# EAGLE board Protoboard (EAGLE 6.5.0)
DESIGNER: theairboard.cc; REV: 1.0
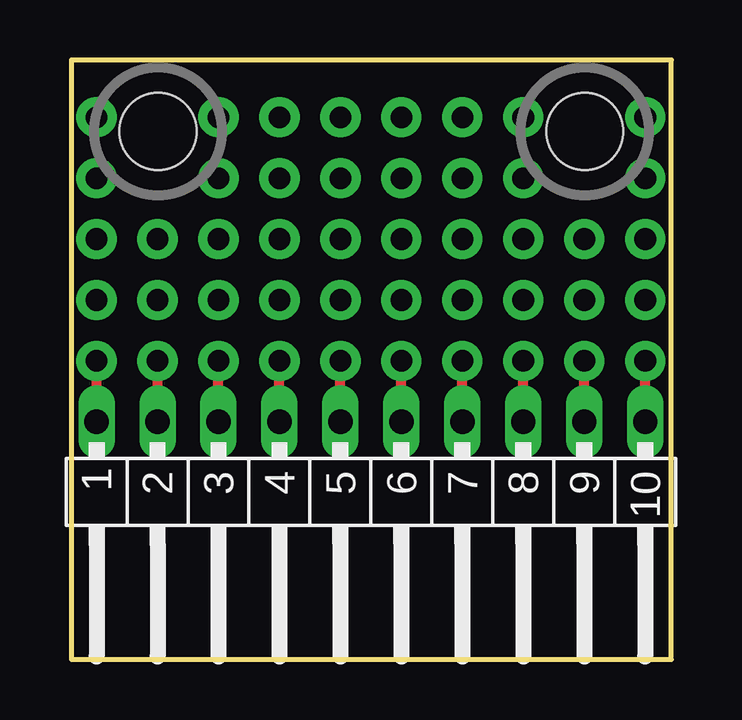
[diagram p0: board, top side]
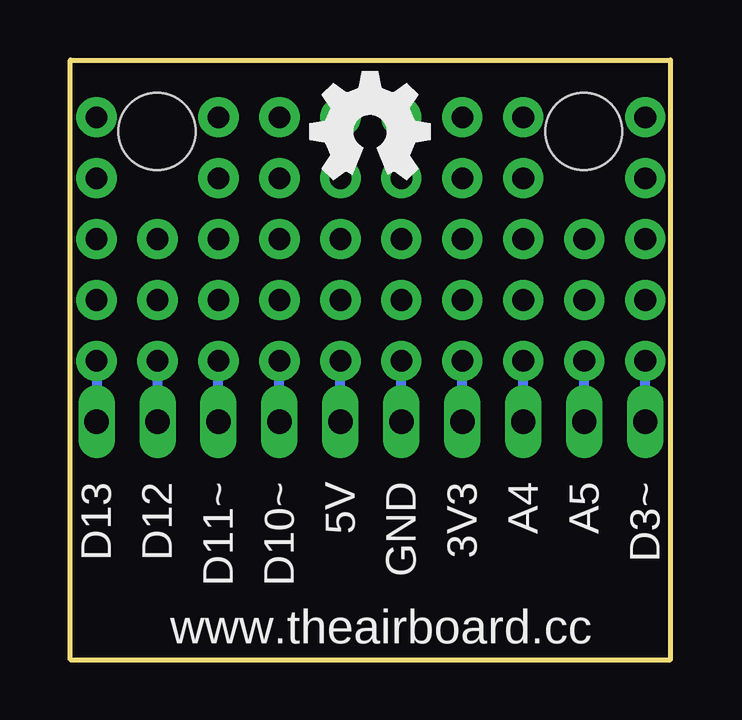
[diagram p1: board, bottom side, seen from below]

Size 25 x 25 mm. Coordinates in mm from the lower left corner, seen from the top.
Copper layers (1*16): Top 0.035mm / dielectric 1.5mm / Bottom 0.035mm
Design rules "default": minimum track width 10mil, minimum drill 24mil, track to track 8mil, track to pad 8mil, pad to pad 8mil, via to via 8mil, smd to smd 8mil, copper to edge 40mil, drill to drill 8mil, minimum pad ring 10mil, minimum via ring 8mil, stop-mask expansion 4mil, vias tented up to drill 0mil, thermal gap 10mil

## Footprints (pad centres in the part's own frame; a part is rotated, then mirrored left to right if it is on the bottom)
LAYOUT = hole 3.2: 21.61,22.275; 3.83,22.275
SIL-1X10 = drill 1.016 long: 1 11.43,0; 2 8.89,0; 3 6.35,0; 4 3.81,0; 5 1.27,0; 6 -1.27,0; 7 -3.81,0; 8 -6.35,0; 9 -8.89,0; 10 -11.43,0

## Placement (x,y rotation side)
FRAME1  SCH_FRAME  [LAYOUT]  -0.22,-0.25 0 top
JP1  SIL  [SIL-1X10]  12.48,9.91 180 top
U$1  [BRD_FRAME]  -96.74,-76.45 0 top  (outside the outline)

## Library data of the parts
FRAME1 U$1 = theairboard
JP1 = theairboard; MANUFACTURER: FCI; OC_FARNELL: 1097958; OC_NEWARK: 93K5133; PART_NUMBER: 77315-818-36LF

## Nets
S$2: JP1.9
S$3: JP1.8
S$4: JP1.7
S$5: JP1.6
S$6: JP1.5
S$7: JP1.4
S$8: JP1.3
S$9: JP1.2
S$10: JP1.1
S$56: JP1.10

## Tracks (layer width: path | path; a pad name or v marks a point on that pad's centre or on a via)
S$2  (via drill 0.9 pad 1.68)
  Top 0.406: JP1.9 v21.37,12.45
  Bottom 0.406: JP1.9 v21.37,12.45
S$3  (via drill 0.9 pad 1.68)
  Top 0.406: JP1.8 v18.83,12.45
  Bottom 0.406: JP1.8 v18.83,12.45
S$4  (via drill 0.9 pad 1.68)
  Top 0.406: JP1.7 v16.29,12.45
  Bottom 0.406: JP1.7 v16.29,12.45
S$5  (via drill 0.9 pad 1.68)
  Top 0.406: JP1.6 v13.75,12.45
  Bottom 0.406: JP1.6 v13.75,12.45
S$6  (via drill 0.9 pad 1.68)
  Top 0.406: JP1.5 v11.21,12.45
  Bottom 0.406: JP1.5 v11.21,12.45
S$7  (via drill 0.9 pad 1.68)
  Top 0.406: JP1.4 v8.67,12.45
  Bottom 0.406: JP1.4 v8.67,12.45
S$8  (via drill 0.9 pad 1.68)
  Top 0.406: JP1.3 v6.13,12.45
  Bottom 0.406: JP1.3 v6.13,12.45
S$9  (via drill 0.9 pad 1.68)
  Top 0.406: JP1.2 v3.59,12.45
  Bottom 0.406: JP1.2 v3.59,12.45
S$10  (via drill 0.9 pad 1.68)
  Top 0.406: JP1.1 v1.05,12.45
  Bottom 0.406: JP1.1 v1.05,12.45
S$11  (via drill 0.9 pad 1.68)
  other vias: 23.91,14.99
S$12  (via drill 0.9 pad 1.68)
  other vias: 23.91,17.53
S$13  (via drill 0.9 pad 1.68)
  other vias: 23.91,20.07
S$14  (via drill 0.9 pad 1.68)
  other vias: 23.91,22.61
S$15  (via drill 0.9 pad 1.68)
  other vias: 21.37,17.53
S$16  (via drill 0.9 pad 1.68)
  other vias: 21.37,14.99
S$17  (via drill 0.9 pad 1.68)
  other vias: 18.83,14.99
S$18  (via drill 0.9 pad 1.68)
  other vias: 18.83,17.53
S$19  (via drill 0.9 pad 1.68)
  other vias: 18.83,20.07
S$20  (via drill 0.9 pad 1.68)
  other vias: 18.83,22.61
S$21  (via drill 0.9 pad 1.68)
  other vias: 16.29,22.61
S$22  (via drill 0.9 pad 1.68)
  other vias: 16.29,20.07
S$23  (via drill 0.9 pad 1.68)
  other vias: 16.29,17.53
S$24  (via drill 0.9 pad 1.68)
  other vias: 16.29,14.99
S$25  (via drill 0.9 pad 1.68)
  other vias: 13.75,14.99
S$26  (via drill 0.9 pad 1.68)
  other vias: 13.75,17.53
S$27  (via drill 0.9 pad 1.68)
  other vias: 11.21,20.07
S$28  (via drill 0.9 pad 1.68)
  other vias: 13.75,20.07
S$29  (via drill 0.9 pad 1.68)
  other vias: 13.75,22.61
S$30  (via drill 0.9 pad 1.68)
  other vias: 11.21,22.61
S$31  (via drill 0.9 pad 1.68)
  other vias: 11.21,17.53
S$32  (via drill 0.9 pad 1.68)
  other vias: 11.21,14.99
S$33  (via drill 0.9 pad 1.68)
  other vias: 8.67,14.99
S$34  (via drill 0.9 pad 1.68)
  other vias: 8.67,17.53
S$35  (via drill 0.9 pad 1.68)
  other vias: 8.67,20.07
S$36  (via drill 0.9 pad 1.68)
  other vias: 8.67,22.61
S$37  (via drill 0.9 pad 1.68)
  other vias: 6.13,22.61
S$38  (via drill 0.9 pad 1.68)
  other vias: 6.13,20.07
S$39  (via drill 0.9 pad 1.68)
  other vias: 3.59,17.53
S$40  (via drill 0.9 pad 1.68)
  other vias: 6.13,17.53
S$41  (via drill 0.9 pad 1.68)
  other vias: 6.13,14.99
S$42  (via drill 0.9 pad 1.68)
  other vias: 3.59,14.99
S$43  (via drill 0.9 pad 1.68)
  other vias: 1.05,14.99
S$44  (via drill 0.9 pad 1.68)
  other vias: 1.05,17.53
S$45  (via drill 0.9 pad 1.68)
  other vias: 1.05,20.07
S$46  (via drill 0.9 pad 1.68)
  other vias: 1.05,22.61
S$56  (via drill 0.9 pad 1.68)
  Top 0.406: JP1.10 v23.91,12.45
  Bottom 0.406: v23.91,12.45 JP1.10